# Altium PCB OSHChip_V1.0.PcbDoc
Units mil, origin at the board's own origin, x right, y up, seen from the top; angles counter-clockwise.
Board outline 350 x 780 mil, 2 copper layers (Top Layer, Bottom Layer); 23 components, 47 nets, 124 pads, 24 vias.
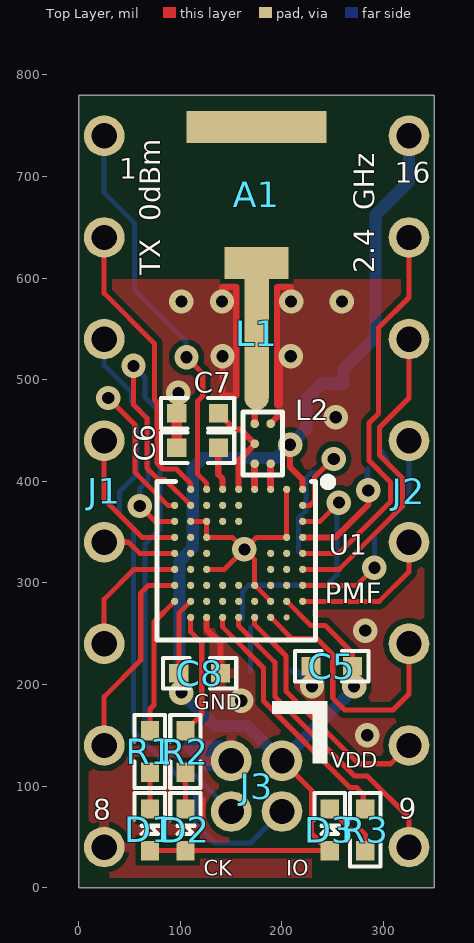
[diagram p0: Top Layer view]
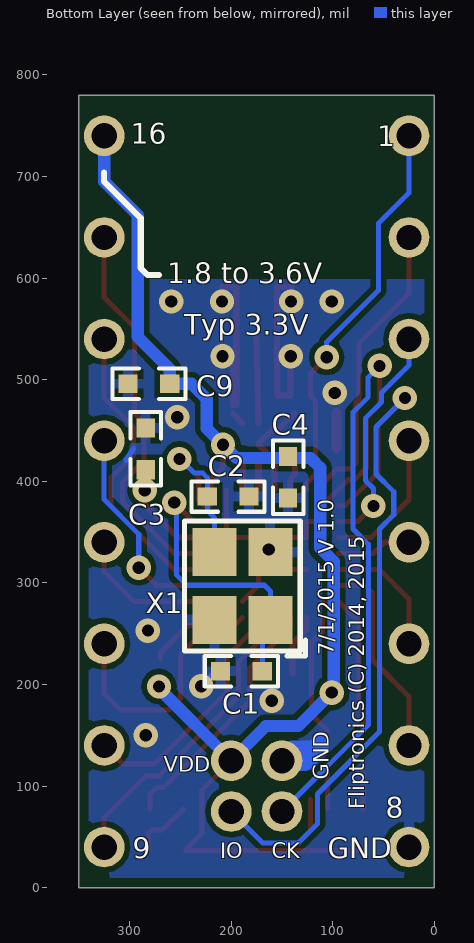
[diagram p1: Bottom Layer view, seen from below]
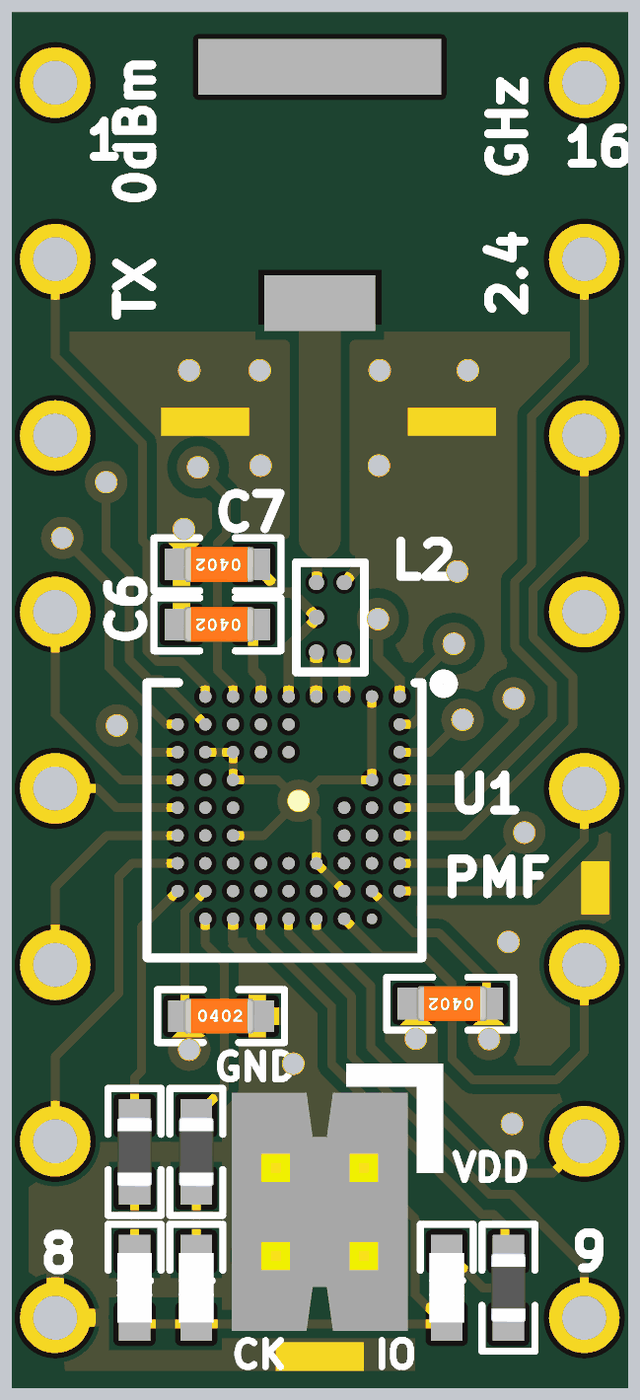
[diagram p2: 3D render of the assembled board from above, using the file's embedded part models]
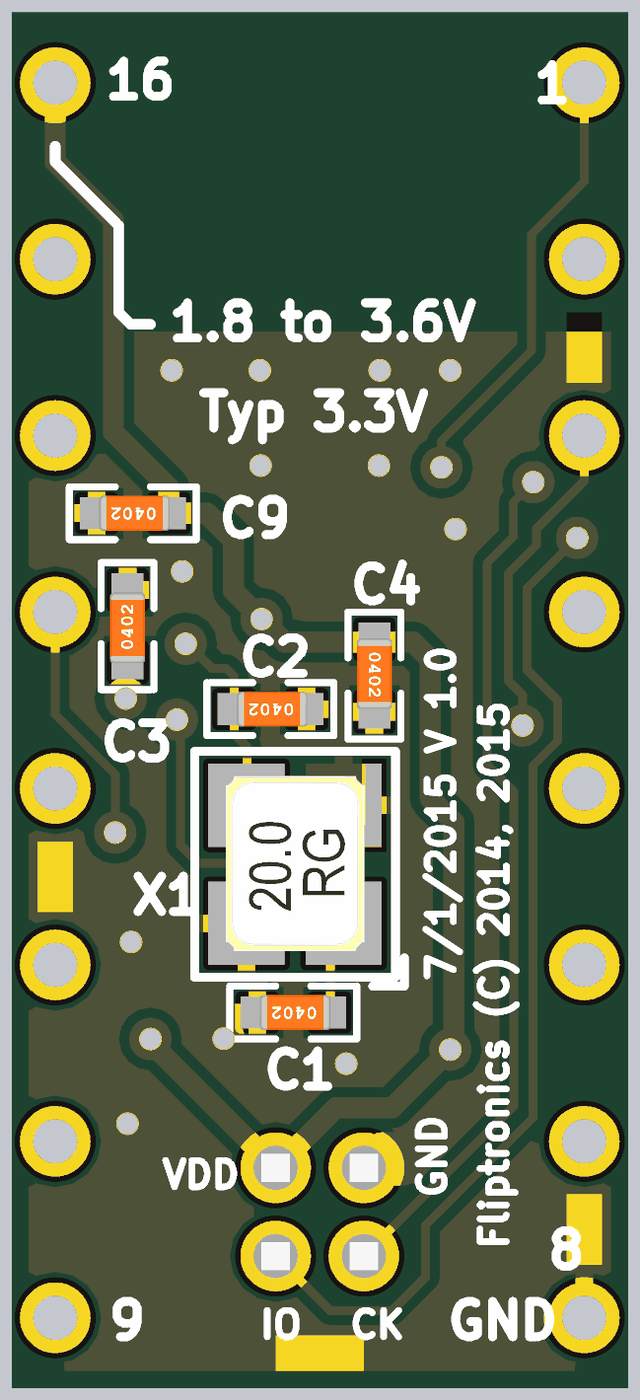
[diagram p3: 3D render of the assembled board from below, using the file's embedded part models]

## Layer stack, top to bottom
Top Layer: signal copper 1.4
Dielectric: dielectric 12.6, FR-4, Dk 4.8
Bottom Layer: signal copper 1.4

## Board outline
0,0 350,0 350,780 0,780 0,0

## Design rules (kind name [scope] priority, off if disabled: settings)
Clearance Net_Exception_1 [InNet('SWDCLK') vs (InNet('SWDIO') OR InNet('P0_18'))] p1: gap=5
Clearance Net_Exception_2 [InNet('VCC_NRF') vs (InNet('P0_5') OR InNet('P0_8') OR InNet('P0_27'))] p2: gap=5
Clearance Net_Exception_3 [InNet('GND') vs (InNet('P0_30') OR InNet('P0_29') OR InNet('RF'))] p3: gap=5
Clearance Polygon [(InNamedPolygon('Top_GND_Pour')) or (InNamedPolygon('Bottom_GND_Pour')) or (InNamedPolygon('Mid_Layer_1-GND')) or (InNamedPolygon('Mid_Layer_2-GND'))] p4: gap=5.5
Clearance [All] p5: gap=5.3
ComponentClearance [All] p1 off: gap=10 collisioncheckmode=3 verticalgap=10 showdistances=FALSE
FabricationTestPointUsage TestPointUsage [All] p1: valid=0 allowmultiple=FALSE
FabricationTestpoint Testpoint [All] p1: side=3 testpointundercomponent=TRUE minsize=40 maxsize=100 preferedsize=60 minholesize=0 maxholesize=40 preferedholesize=32 testpointgrid=1 allowsidetop=TRUE allowsidebottom=TRUE usegrid=TRUE gridtolerance=0.01
Height [All] p1 off: minheight=0 maxheight=1000 prefheight=500
HoleSize [All] p1: absolutevalues=TRUE maxlimit=160 minlimit=10 maxpercent=80.000 minpercent=20.000
HoleToHoleClearance [All] p1 off: gap=3 allowstackedmicrovias=FALSE
MinimumAnnularRing [All] p1 off: minimumring=5
MinimumSolderMaskSliver [All] p1: minsoldermaskwidth=2
PolygonConnect PolygonConnect_J8 [InComponent('J8')] p1: connectstyle=Direct reliefconductorwidth=10 reliefentries=4 polygonreliefangle="90 Angle"
PolygonConnect PolygonConnect_J14 [InComponent('J14')] p2: connectstyle=Direct reliefconductorwidth=10 reliefentries=4 polygonreliefangle="90 Angle"
PolygonConnect PolygonConnect_GND_Vias [isVia and innet(gnd)] p3: connectstyle=Direct reliefconductorwidth=10 reliefentries=4 polygonreliefangle="90 Angle"
PolygonConnect [All] p4: connectstyle=Relief reliefconductorwidth=10 reliefentries=4 polygonreliefangle="90 Angle"
RoutingCorners [All] p1: cornerstyle=45-Degree minsetback=20 maxsetback=20
RoutingVias [All] p1: holewidth=10 width=20 viastyle="Through Hole" minholewidth=10 minwidth=20 maxholewidth=28 maxwidth=50
SilkToSilkClearance [All] p1: silktosilkclearance=0
SilkscreenOverComponentPads [IsPad] p1: minsilkscreentomaskgap=3
SolderMaskExpansion [All] p1: expansion=3
Width [All] p1: maxlimit=100 minlimit=5 preferedwidth=6
18 further rules are at their usual default settings.

## Components (designator, comment, footprint, x,y, rotation, side; value= is the part's Value field where it differs from the comment)
A1 "Chip Antenna, 2.450 GHz" AMCA31-2R450G-S1F-T 175,682 r0 top
C1 "12 pF 0402" "0402 CAP RouteThru" 190,213 r180 bottom
C2 "12 pF 0402" "0402 CAP RouteThru" 203,385 r180 bottom
C3 "0.1 uF 0402" "0402 CAP RouteThru" 284,432 r270 bottom
C4 "1.0 nF 0402" "0402 CAP RouteThru" 144,404 r90 bottom
C5 "0.1 uF 0402" "0402 CAP RouteThru" 249,218 r0 top
C6 "47 nF 0402" "0402 CAP RouteThru" 117,433 r0 top
C7 "2.2 nF 0402" "0402 CAP RouteThru" 117,467 r0 top
C8 "0.1 uF 0402" "0402 CAP RouteThru" 119,211 r180 top
C9 "0.1 uF 0402" "0402 CAP RouteThru" 281,496 r180 bottom
D1 "Red LED 0402" "0402 LED Route Thru RED" 70,57 r90 top
D2 "Green LED 0402" "0402 LED Route Thru GREEN" 105,57 r90 top
D3 "Blue LED 0402" "0402 LED Route Thru BLUE" 247,57 r90 top
J1 "DIP Pin 8" "SIP 8    P2.54MM" 25,740 r270 top
J2 "DIP Pin 8" "SIP 8    P2.54MM" 325,40 r90 top
J3 "FTSH-102-01-L-D" HDR_2x2_1.27mm-Through_Hole_SWD 175,100 r180 top
L1 "CPW 125mil" CPW_125 176.2,554.1 r0 top
L2 "Balun WLCSP" BAL-ST-WLCSP 181,437 r90 top
R1 "4.7K 0402" "0402 Res Route Thru" 70,134 r270 top
R2 "4.7K 0402" "0402 Res Route Thru" 105,134 r270 top
R3 "4.7K 0402" "0402 Res Route Thru" 282,57 r270 top
U1 "nRF51822_CFAC WLCSP" BGA62C40P9X9_383X383X55 155,322 r270 top
X1 "16 MHz 2.5mm x 2.0mm" BT-XTAL_2520 189,297 r90 bottom

## Footprints (in the part's own frame and the unit in brackets; to place one, negate y for a bottom-side part, rotate by r counter-clockwise, add the part's x,y. Pads: shape width x height; smd on the part's side, far side on the other; paste and mask are expansions set on the pad)
"0402 CAP RouteThru" [mil] "Cap 0402 1005mm, 22 mil pad to pad"
  rect 19x18 smd: 1(-20.5,0) 2(20.5,0)
  silkscreen extent -36,-15 36,15, body extent -19,-10 21,10, height 20
"0402 LED Route Thru BLUE" [mil] "LED 0402 1005mm, 22 mil pad to pad"
  rect 19x18 smd: 1(-20.5,0) 2(20.5,0)
  silkscreen extent -4,-15 36,15, body extent -20,-10 20,10, height 21
"0402 LED Route Thru GREEN" [mil] "LED 0402 1005mm, 22 mil pad to pad"
  rect 19x18 smd: 1(-20.5,0) 2(20.5,0)
  silkscreen extent -4,-15 36,15, body extent -20,-10 20,10, height 21
"0402 LED Route Thru RED" [mil] "LED 0402 1005mm, 22 mil pad to pad"
  rect 19x18 smd: 1(-20.5,0) 2(20.5,0)
  silkscreen extent -4,-15 36,15, body extent -20,-10 20,10, height 21
"0402 Res Route Thru" [mil] "Res 0402 1005mm, 22 mil pad to pad"
  rect 19x18 smd: 1(-20.5,0) 2(20.5,0)
  silkscreen extent -36,-15 36,15, body extent -20,-10 20,10, height 16
AMCA31-2R450G-S1F-T [mm] "Abracon Chip Antenna"
  rect 1.6x0.8 smd: 1(0,-1.7)
  rect 3.5x0.8 smd: 2(0,1.7)
  body extent -0.8,-1.6 0.8,1.6, height 1.3
BAL-ST-WLCSP [mm]
  round 0.22 smd mask+0.051: A1(0.5,0.2) A2(0,0.2) A3(-0.5,0.2) B1(0.5,-0.2) B3(-0.5,-0.2)
  Top Layer pour cut-out: -0.697,-0.43 0.756,-0.43 0.756,0.44 -0.697,0.44
  silkscreen extent -0.79,-0.49 0.79,0.49, body extent -0.7,-0.43 0.76,0.43, height 0.63
BGA62C40P9X9_383X383X55 [mm] "WLCSP, nRF51822, CFAC (32KB RAM)"
  round 0.18 smd mask+0.071: A1(-1.78,1.66) A2(-1.38,1.66) A3(-0.98,1.66) A4(-0.58,1.66) A5(-0.18,1.66) A6(0.22,1.66) A7(0.62,1.66) A8(1.02,1.66) B1(-1.78,1.26) B4(-0.58,1.26) B5(-0.18,1.26) B6(0.22,1.26) B7(0.62,1.26) B8(1.02,1.26) C1(-1.78,0.86) C5(-0.18,0.86) C6(0.22,0.86) C7(0.62,0.86) C8(1.02,0.86) C9(1.42,0.86) D1(-1.78,0.46) D7(0.62,0.46) D8(1.02,0.46) D9(1.42,0.46) E1(-1.78,0.06) E2(-1.38,0.06) E3(-0.98,0.06) E7(0.62,0.06) E8(1.02,0.06) E9(1.42,0.06) F1(-1.78,-0.34) F2(-1.38,-0.34) F3(-0.98,-0.34) F7(0.62,-0.34) F8(1.02,-0.34) F9(1.42,-0.34) G1(-1.78,-0.74) G2(-1.38,-0.74) G3(-0.98,-0.74) G4(-0.58,-0.74) G5(-0.18,-0.74) G6(0.22,-0.74) G7(0.62,-0.74) G8(1.02,-0.74) G9(1.42,-0.74) H1(-1.78,-1.14) H2(-1.38,-1.14) H3(-0.98,-1.14) H4(-0.58,-1.14) H5(-0.18,-1.14) H6(0.22,-1.14) H7(0.62,-1.14) H8(1.02,-1.14) H9(1.42,-1.14) J2(-1.38,-1.54) J3(-0.98,-1.54) J4(-0.58,-1.54) J5(-0.18,-1.54) J6(0.22,-1.54) J7(0.62,-1.54) J8(1.02,-1.54)
  round 0.152 smd mask+0.071: B9(1.42,1.26)
  silkscreen extent -2.07,-1.98 1.98,2.4, body extent -1.92,-1.92 1.92,1.92, height 0.56
BT-XTAL_2520 [mm] "2.5mm x 2.0mm xtal, as used by Nordic"
  rect 1.2x1.1 smd: 1(-0.85,-0.7) 3(0.85,0.7) 4(-0.85,0.7)
  rect 1.2x1.1 smd paste-0.762: 2(0.85,-0.7)
  silkscreen extent -1.75,-1.57 1.63,1.45, body extent -1.25,-1 1.27,1, height 0.56
CPW_125 [mil] "Co Planar Waveguide, 125 mill length.  Needs guard traces"
  oval 24x150 smd paste-13 mask-13: 1(-1.2,-9.1)
HDR_2x2_1.27mm-Through_Hole_SWD [mil] "Pin Header, 1.27mm Through_Hole, FTSH 102 series, \"SWD\" version J-LINK Lite"
  round 40 hole 25: 1(-25,-25) 2(-25,25) 3(25,-25) 4(25,25)
  body extent -50,-68 50,68, height 219
"SIP 8    P2.54MM" [mil] "Etched Metal 8 pin SIP leadframe"
  round 40 hole 25: 1(0,0) 2(100,0) 3(200,0) 4(300,0) 5(400,0) 6(500,0) 7(600,0) 8(700,0)

## Part data
A1: library part "A 2.4_GHZ Abracon Chip Antenna_1", "Chip Antenna 2.4 GHz"
C1 C2: library part "C 12 pF 0402  50V  NP0  5%", "Capacitor 12 pF 0402  50V  NP0  5%"
C3 C5 C8 C9: library part "C 0.1 uF 0402  10 V  X5R 10%", "Capacitor 0.1 uF 0402  10 V  X5R 10%"
C4: library part "C 1.0 nF 0402 25 V X7R  10%", "Capacitor 1.0 nF 0402 25 V X7R  10%"
C6: library part "C 47 nF 0402  16V  X7R  10%", "Capacitor 47 nF 0402  16V  X7R  10%"
C7: library part "C 2.2 nF 0402  50 V X7R  10%", "Capacitor 2.2 nF 0402  50 V X7R  10%"
D1: library part "D LED APHHS1005SURCK", "LED Red 630 nm  0402"
D2: library part "D LED APHHS1005CGCK Green 570nm  0402", "LED APHHS1005CGCK Green 570nm  0402"
D3: library part "D LED LB QH9G-N1P2-35-1", "LED Blue 466 nm  0402"
J1 J2: library part "J DIP Pin 8 Etched", "DIP Pin 8 Etched"
J3: library part "J Header 2X2 J-Link Lite"
L1: library part "L CPW 125mil", "CPW 125mil , over ground plane, .062 board, 50 Ohm"
L2: library part "L BAL-NRF02D3 nRF51822 Balun 50 ohm for 2.45GHz", "Balun matched to WLCSP nRF61822"
R1 R2 R3: library part "R 4.7K 0402 1/16 W 1%", "Resistor 4.7K 0402 1/16 W 1%"
U1: "Multi-protocol Bluetooth Low Energy and 2.4GHz proprietary system-on-chip"
X1: library part "X 16MHz Xtal, 2.5mmx2.0mm, 10ppm,  8 pF", "16MHz Xtal, 2.5mmx2.0mm, 10ppm,  8 pF"

## Via types
v1: diameter 24, hole 12, Top Layer to Bottom Layer, tented both sides, 24 vias

## Nets (pads, with @x,y where several pads share a name; then routed paths per layer and width w, separated by ;. In a path a pad name is that pad's centre, name@x,y a point inside that pad or via, vN(x,y) a via of type N, cw(c..) or ccw(c..) an arc to the next point about the centre after c; other vN are vias at no path point)
ANT1: L2.A3 U1.D1 | length 25.4
  Top Layer w7: U1.D1@172.96,391.88 L2.A3@172.96,417.25
ANT2: L2.B3 U1.C1 | length 25.3
  Top Layer w7: U1.C1 L2.B3@188.86,417.37
DEC1: C3.2 U1.A4 | length 109.5
  Top Layer w6: U1.A4 252.83,344.83 285,377 v1(285,391)
  Bottom Layer w6: v1@284,394 C3.2
DEC2: C6.2 U1.F1 | length 39.6
  Top Layer w6: C6.2@137.31,429.88 137.31,406.69 141.61,402.39 U1.F1
GND: C1.1 C2.2 C3.1 C4.1 C5.1 C6.1 C7.1 C8.1 C9.1 J1.8 J3.3 L2.B1 U1.B1 U1.B4 U1.C8 U1.D7 U1.G3 U1.G4 U1.G6 U1.G9 U1.H3 X1.2 X1.4 | length 911.3
  Top Layer w5: U1.H3 U1.G3 U1.G4 151.17,344.83 v1(163,333) ; 122,59.25 122,87 ; U1.G6 143.34,313.34 v1(163,333) ; U1.C8 U1.D7 173.11,322.89 v1(163,333) ; U1.B1 U1.B4 174.83,344.83 v1(163,333)
  Top Layer w6: U1.G9 125.87,254.13 139.5,240.5 C8.1 ; v1(141,577) 141,591.22 155,591.22 155,484.3 141.46,484.3 v1(141.46,523) ; L2.B1@188.98,456.74 198.03,466.82 ; v1@198.03,523 198.03,475 195,475 195,591.22 209,591.22 v1(209,577)
  Top Layer w10: C6.1 C7.1
  Bottom Layer w5: 296.3,432 303.64,420.5
  Bottom Layer w6: C1.1 214.7,213 v1(229.5,198.2)
  Bottom Layer w20: 113.3,139.5 117.7,135.1 ; 117.7,135.1 127.8,125 J3.3 139.9,135.1 117.7,135.1
  other v1: 284,150 160,184 282,253 253,463 98,487 208.54,523 101,577 259,577
NetD1_2: D1.2 R1.2 | length 36
  Top Layer w5: D1.2 R1.2
NetD2_2: D2.2 R2.2 | length 36
  Top Layer w5: D2.2 R2.2
NetD3_2: D3.2 R3.2 | length 61.4
  Top Layer w5: D3.2 267.59,56.91 277.63,56.91 282,52.54 R3.2
P0_0: J2.3 U1.C9 | length 254.9
  Top Layer w5: U1.C9 209.95,245 234.57,245 250,229.57 250,186.58 261.65,174.93 309.27,174.93 325,190.66 J2.3
P0_1: J2.1 U1.E9 | length 303
  Top Layer w5: U1.E9 157.36,257.64 193,222 193,188.3 271.3,110 284,110 325,69 J2.1
P0_2: J2.2 U1.D9 | length 243.5
  Top Layer w5: U1.D9 173.11,258.89 204,228 204,193.4 275.4,122 307,122 J2.2
P0_3: R3.1 U1.F9 | length 249.8
  Top Layer w5: U1.F9 141.61,256.39 181.72,216.28 181.72,183.73 266.94,98.5 273.59,98.5 280,92.09 R3.1@280,77.5
P0_4: U1.F8
P0_5: R2.1 U1.H9 | length 122.7
  Top Layer w5: R2.1 121,170.5 121,241 110.12,251.88 U1.H9
P0_6: U1.G8
P0_7: U1.H7
P0_8: R1.1 U1.J8 | length 137.4
  Top Layer w5: R1.1 70,175.89 74,179.89 74,261.47 U1.J8
P0_9: J1.7 U1.J7 | length 201.4
  Top Layer w5: J1.7 25,188.02 61,224.02 61,290 68.59,297.59 U1.J7
P0_10: U1.H6
P0_11: J1.6 U1.J6 | length 125.5
  Top Layer w5: J1.6 25,284 54.34,313.34 U1.J6
P0_12: J1.5 U1.J5 | length 73.9
  Top Layer w5: J1.5 49,340 59.91,329.09 U1.J5
P0_13: U1.H5
P0_14: U1.H4
P0_15: J1.4 U1.J4 | length 142.8
  Top Layer w5: J1.4 25,382 62.17,344.83 U1.J4
P0_16: J1.3 U1.J3 | length 226.1
  Top Layer w5: v1(60,375.7) 75.12,360.58 U1.J3
  Bottom Layer w5: J1.3 25,514.2 52.1,487.1 52.1,477.9 68,462 68,400.9 60,392.9 v1(60,375.7)
P0_17: U1.G2
P0_18: J1.2 U1.H1 | length 290.8
  Top Layer w5: J1.2 25,585 74.4,535.6 74.4,480.6 77,478 77,418 83,412 96,412 110.12,397.88 U1.H1
P0_19: U1.F2
P0_20: J1.1 U1.G1 | length 393.8
  Top Layer w5: v1(106,522) 122,506 122,484 117,479 117,407 125.87,398.13 U1.G1
  Bottom Layer w5: J1.1 25,684 55,654 55,588 106,537 v1(106,522)
P0_21: J2.7 U1.A5 | length 392.8
  Top Layer w5: U1.A5 256.09,329.09 306.91,379.91 306.91,399.17 285.7,420.38 285.7,457.27 295,466.57 295,551 325,581 J2.7
P0_22: U1.B5
P0_23: U1.B6
P0_24: J2.6 U1.A6 | length 309.7
  Top Layer w5: U1.A6 256.34,313.34 318.47,375.47 318.47,403.22 296,425.69 296,453 325,482 J2.6
P0_25: U1.C5
P0_26: J2.5 U1.A7 | length 216.9
  Top Layer w5: U1.A7 273.59,297.59 v1(291,315)
  Bottom Layer w5: v1(291,315) 291,348 325,382 J2.5
P0_27: J2.4 U1.A8 | length 145.7
  Top Layer w5: U1.A8 295.84,281.84 325,311 J2.4
P0_28: U1.B7
P0_29: U1.C7
P0_30: U1.D8
P0_31: U1.E8
RF: A1.1 L1.1 L2.A1 | length 88.3
  Top Layer w6: L2.A1@173.23,456.74 L1.1
SWDCLK: J3.4 U1.H2 | length 655.2
  Top Layer w5: v1(53.9,513.6) 53.9,475.26 67,462.16 67,413 78.45,401.55 84.9,401.55 U1.H2
  Bottom Layer w5: v1(53.9,513.6) 65.2,502.3 65.2,482.8 80,468 80,353 65,338 65,160 J3.4
SWDIO: J3.2 U1.J2 | length 711.5
  Top Layer w5: v1(29,482) 55.5,455.5 55.5,408.5 87.67,376.33 U1.J2
  Bottom Layer w5: v1(29,482) 57.5,453.5 57.5,407.2 40,389.7 40,367 54,353 54,153.38 115.04,92.34 115.04,62.96 134,44 169,44 J3.2
VCC_NRF: C4.2 C5.2 C8.2 C9.2 D1.1 D2.1 D3.1 J2.8 J3.1 U1.A1 U1.B8 U1.H8 | length 1420.7
  Top Layer w5: D1.1 D2.1 D3.1@245,36.5 ; C8.2 98.5,270.22 U1.H8 ; J3.1 229,96 229,53.25 D3.1@242.89,39.36 ; U1.B8 228.36,258.09 242.53,258.09 269.5,231.11 C5.2@269.5,225
  Top Layer w6: v1(208,436) 208,414 220.35,401.65 U1.A1
  Bottom Layer w12: v1@99,192 99,321 112.25,334.25 112.25,413.25 122,423 195,423 v1(208,436) 224,452 224,481 239,496 C9.2 260.5,510.5 292,542 292,662 325,695 J2.8 ; v1(101,192) 134,159 166,159 J3.1 v1@272,197
  other v1: 271,198
VDD_PA: C7.2 L2.A2 U1.E1 | length 98.9
  Top Layer w6: C7.2 153.5,451 159.28,451 L2.A2@173.23,437.06 ; U1.E1 157.36,420.4 L2.A2@173.23,436.27
XC1: C2.1 U1.A2 X1.3 | length 174
  Top Layer w5: U1.A2 227.42,376.33 232,380.91 232,404 v1@251,423
  Bottom Layer w5: X1.3@216.27,330.86 216.27,363.77 223.5,371 C2.1 223.5,403.5 228,408 236,408 v1@250.5,422.5
  other v1: 251,422
XC2: C1.2 U1.A3 X1.1 | length 284.6
  Top Layer w5: U1.A3 237.58,360.58 v1(256,379)
  Bottom Layer w5: X1.1@161.15,263.93 161.15,291.55 167.24,297.64 243.64,297.64 254,308 v1@254,379 ; C1.2@169,213 X1.1@169,256.08
pads on no net: A1.2 U1.B9 U1.C6 U1.E2 U1.E3 U1.E7 U1.F3 U1.F7 U1.G5 U1.G7

## Polygon pours and split planes (outlines as drawn)
GND on Top Layer "Top_GND_Pour" (solid, remove dead copper, pour order 4): 10,10 340,10 340,599 10,599 10,10
GND on Bottom Layer "Bottom_GND_Pour" (solid, remove dead copper, pour order 3): 10,10 340,10 340,599 10,599 10,10

## Other copper
Top Layer:
  pour cut-out: 246.98,7.8 229.19,7.8 229.19,37.8 246.98,37.8
  pour cut-out: 96.01,21.5 78.22,21.5 78.22,51.5 96.01,51.5
  pour cut-out: 90.5,87 90.5,104.79 119.5,104.79 119.5,87
  pour cut-out: 55.5,86.1 55.5,103.89 84.5,103.89 84.5,86.1
  pour cut-out: 90.57,441.05 90.57,458.84 102.66,458.84 102.66,441.05
  pour cut-out: 155,603 195,603 195,469.22 155,469.22
  pour cut-out: 80,403.29 230,403.29 230,255.3 80,255.3
  pour cut-out: 100,157.79 100,140 70,140 70,157.79
Bottom Layer:
  pour cut-out: 136,302 136,292.66 134.54,292.66 134.54,302
  pour cut-out: 202.42,227.12 202.42,235.23 203.89,235.23 203.89,227.12
  pour cut-out: 154.5,218.31 154.5,236.1 166.89,236.1 166.89,218.31

## Silkscreen, mask and mechanical layers (free items; w line width, h text height)
Top Overlay:
  rectangle: 190,171 245,184
  rectangle: 230,122 245,184
  text "1" at 40,698 h20
  text "16" at 311,694 h20
  text "2.4  GHz" at 291,605 h20 r90
  text "TX  0dBm" at 80,603 h20 r90
  text "PMF" at 242,280 h20
  text "GND" at 113,175 h15
  text "VDD" at 248,118 h15
  text "9" at 315,68 h20
  text "8" at 14,67 h20
  text "CK" at 123,12 h15
  text "IO" at 204,12 h15
Bottom Overlay:
  lines w6: 271,603 282.17,603 289,609.83 289,659 325,695 325,704
  text "16" at 299,732 h20
  text "1" at 56,730 h20
  text "1.8 to 3.6V" at 262.83,595 h20
  text "Typ 3.3V" at 246,544 h20
  text "7/1/2015 V 1.0" at 99,229 h15 r270
  text "VDD" at 266.46,114 h15
  text "GND" at 104,106 h15 r270
  text "Fliptronics (C) 2014, 2015" at 69,77 h15 r270
  text "8" at 48,69 h20
  text "GND" at 105,29 h20
  text "CK" at 160,29 h15
  text "IO" at 211,29 h15
  text "9" at 297,29 h20
Bottom Paste:
  rectangle: 140,307 183,319
  rectangle: 140,307 149,354
Top Solder:
  rectangle: 140.1,603 210,634
  rectangle: 85,540 135,556
  rectangle: 225,540 275,556
  rectangle: 150,10 200,26
  region: 323.3,298.6 323.3,268.6 339.3,268.6 339.3,298.6
Bottom Solder:
  rectangle: 150,10 200,30
  region: 35,70 35,110 15,110 15,70
  region: 335,270 335,310 315,310 315,270
  region: 35,570 35,610 15,610 15,570
  rectangle: 137,304 151,356.9
  rectangle: 137,304 186.3,321
Mechanical 31 Board Outline:
  the board outline again, w6